# Altium PCB BMS_MASTER.PcbDoc (part 2 of 2)
Units mm, origin at the board's own origin, x right, y up, seen from the top; angles counter-clockwise.
Board outline 297.7 x 100 mm, 4 copper layers (Top Layer, Layer 1, Layer 2, Bottom Layer), stack 0.603 mm thick; 101 components, 64 nets, 488 pads, 105 vias.
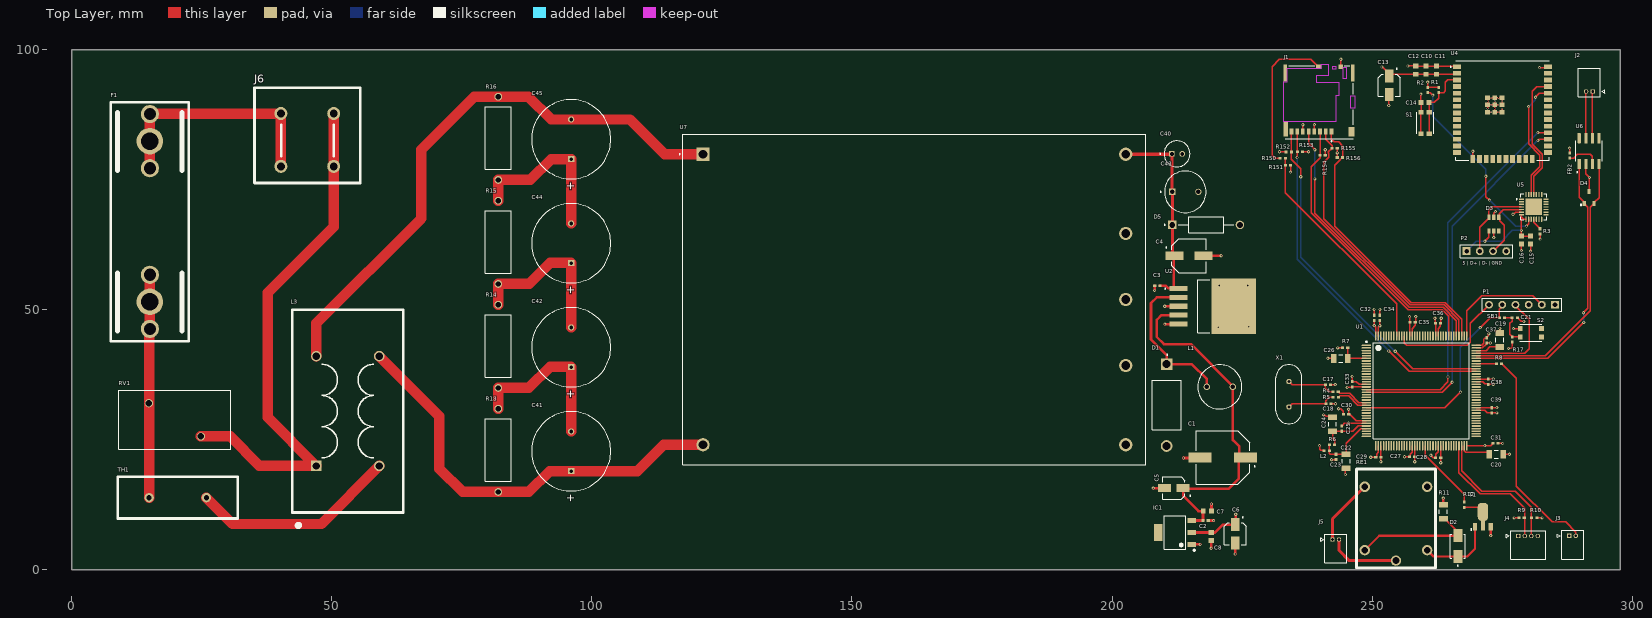
[diagram p0: Top Layer view]

## Via types
v1: diameter 0.6, hole 0.3, Top Layer to Bottom Layer, 105 vias

## Nets (pads, with @x,y where several pads share a name; then routed paths per layer and width w, separated by ;. In a path a pad name is that pad's centre, name@x,y a point inside that pad or via, vN(x,y) a via of type N, cw(c..) or ccw(c..) an arc to the next point about the centre after c; other vN are vias at no path point) (continued)
VDD: (continued)
  Top Layer w0.5: IC1.2 219.075,7.2 C8.1 ; C8.1@219.06,7.115 219.135,7.19 219.8,7.19 221.31,8.7 C6.1 223.8,8.8 v1(223.8,10.7) ; v1@237.753,80.38 237.773,80.4 v1(237.8,80.4) ; v1(241,80.8) v1@241.005,80.795 ; R154.2@241.005,79.76 R154.2 ; v1(243.3,80.2) v1@243.319,80.181 ; R156.2@243.319,79.381 243.35,79.35 R156.2@243.35,79.3 ; R7.1@244.27,42.69 R7.1 ; C29.1@251.65,21.7 C29.1 ; v1(262.094,48.406) v1@262.113,48.387 ; v1(263.7,13.8) 263.7,12.564 R11.2
  other v1: 271.7,23.9 257.194,48.706
VDDA: C22.1 C23.2 L2.2 R6.1 U1.33 | length 12
  Top Layer w0.254: L2.2 241.792,22.414 241.962,22.244 C22.1 245.012,24.364 247.82,27.172 248.903,27.172 U1.33 ; L2.2@241.812,23.06 R6.1
VREF+: C24.1 C25.1 R6.2 U1.32 | length 9.7
  Top Layer w0.254: R6.2@242.812,24.044 242.812,24.908 242.412,25.308 C24.1 244.202,26.644 246.292,26.644 247.329,27.681 U1.32
pads on no net: D3.1@271.8,65.1 D3.3 IC1.4 J1.P1 J1.P2 J1.P3 J1.P4 RE1.5 S2.1_2 S2.2_2 U1.1 U1.2 U1.3 U1.4 U1.5 U1.7 U1.8 U1.9 U1.10 U1.11 U1.12 U1.13 U1.14 U1.15 U1.20 U1.21 U1.22 U1.26 U1.27 U1.28 U1.29 U1.34 U1.35 U1.36 U1.37 U1.40 U1.41 U1.42 U1.43 U1.44 U1.45 U1.46 U1.47 U1.48 U1.49 U1.50 U1.53 U1.54 U1.55 U1.57 U1.58 U1.59 U1.60 U1.63 U1.64 U1.65 U1.66 U1.67 U1.68 U1.73 U1.74 U1.75 U1.76 U1.77 U1.78 U1.79 U1.80 U1.81 U1.82 U1.85 U1.86 U1.87 U1.88 U1.89 U1.90 U1.91 U1.92 U1.93 U1.96 U1.97 U1.110 U1.114 U1.115 U1.117 U1.118 U1.119 U1.122 U1.123 U1.124 U1.125 U1.126 U1.127 U1.128 U1.129 U1.132 U1.134 U1.135 U1.137 U1.138 U1.139 U1.140 U1.141 U1.142 U4.4 U4.5 U4.6 U4.7 U4.8 U4.9 U4.10 U4.11 U4.12 U4.13 U4.14 U4.16 U4.17 U4.18 U4.19 U4.20 U4.21 U4.22 U4.23 U4.24 U4.25 U4.26 U4.29 U4.30 U4.31 U4.32 U4.33 U4.36 U4.37 U5.1 U5.2 U5.3 U5.10 U5.12 U5.13 U5.14 U5.15 U5.16 U5.17 U5.18 U5.19 U5.20 U5.21 U5.22 U5.23 U5.24 U5.27 U5.28 U5.29 U6.5 U6.8 U7.4 U7.6 U7.7

## Polygon pours and split planes (outlines as drawn)
GND on Layer 1 "GND_L02_P000" (solid, pour order 0): 297.7,0 297.7,100 197.4,100 197.4,0
VDD on Layer 2 "VDD_L03_P001" (solid, pour order 1): 297.7,0 297.7,100 197.4,100 197.4,0

## Silkscreen, mask and mechanical layers (free items; w line width, h text height)
Top Overlay:
  text "5 | D+ | D- | GND" at 267.4,58.7 h0.6
Mechanical 1:
  the board outline again, w0.5

## Text inside footprints (layer, text, board x,y; h text height)
C41: Top Overlay "+" at 95.263,14.678 h1.5 r270
C42: Top Overlay "+" at 95.263,34.678 h1.5 r270
C44: Top Overlay "+" at 95.263,54.678 h1.5 r270
C45: Top Overlay "+" at 95.263,74.678 h1.5 r270
J2: Mechanical 13 "PTH D0.5 +/- 0.05" at 294.9,101.5 h0.5 r180